# Altium PCB UPRISE3D-DW01(修改logo).PCBDOC (part 1 of 2)
Units mm, origin at the board's own origin, x right, y up, seen from the top; angles counter-clockwise.
Board outline 89.99 x 190.32 mm, 2 copper layers (Top Layer, Bottom Layer); 201 components, 175 nets, 672 pads, 420 vias.
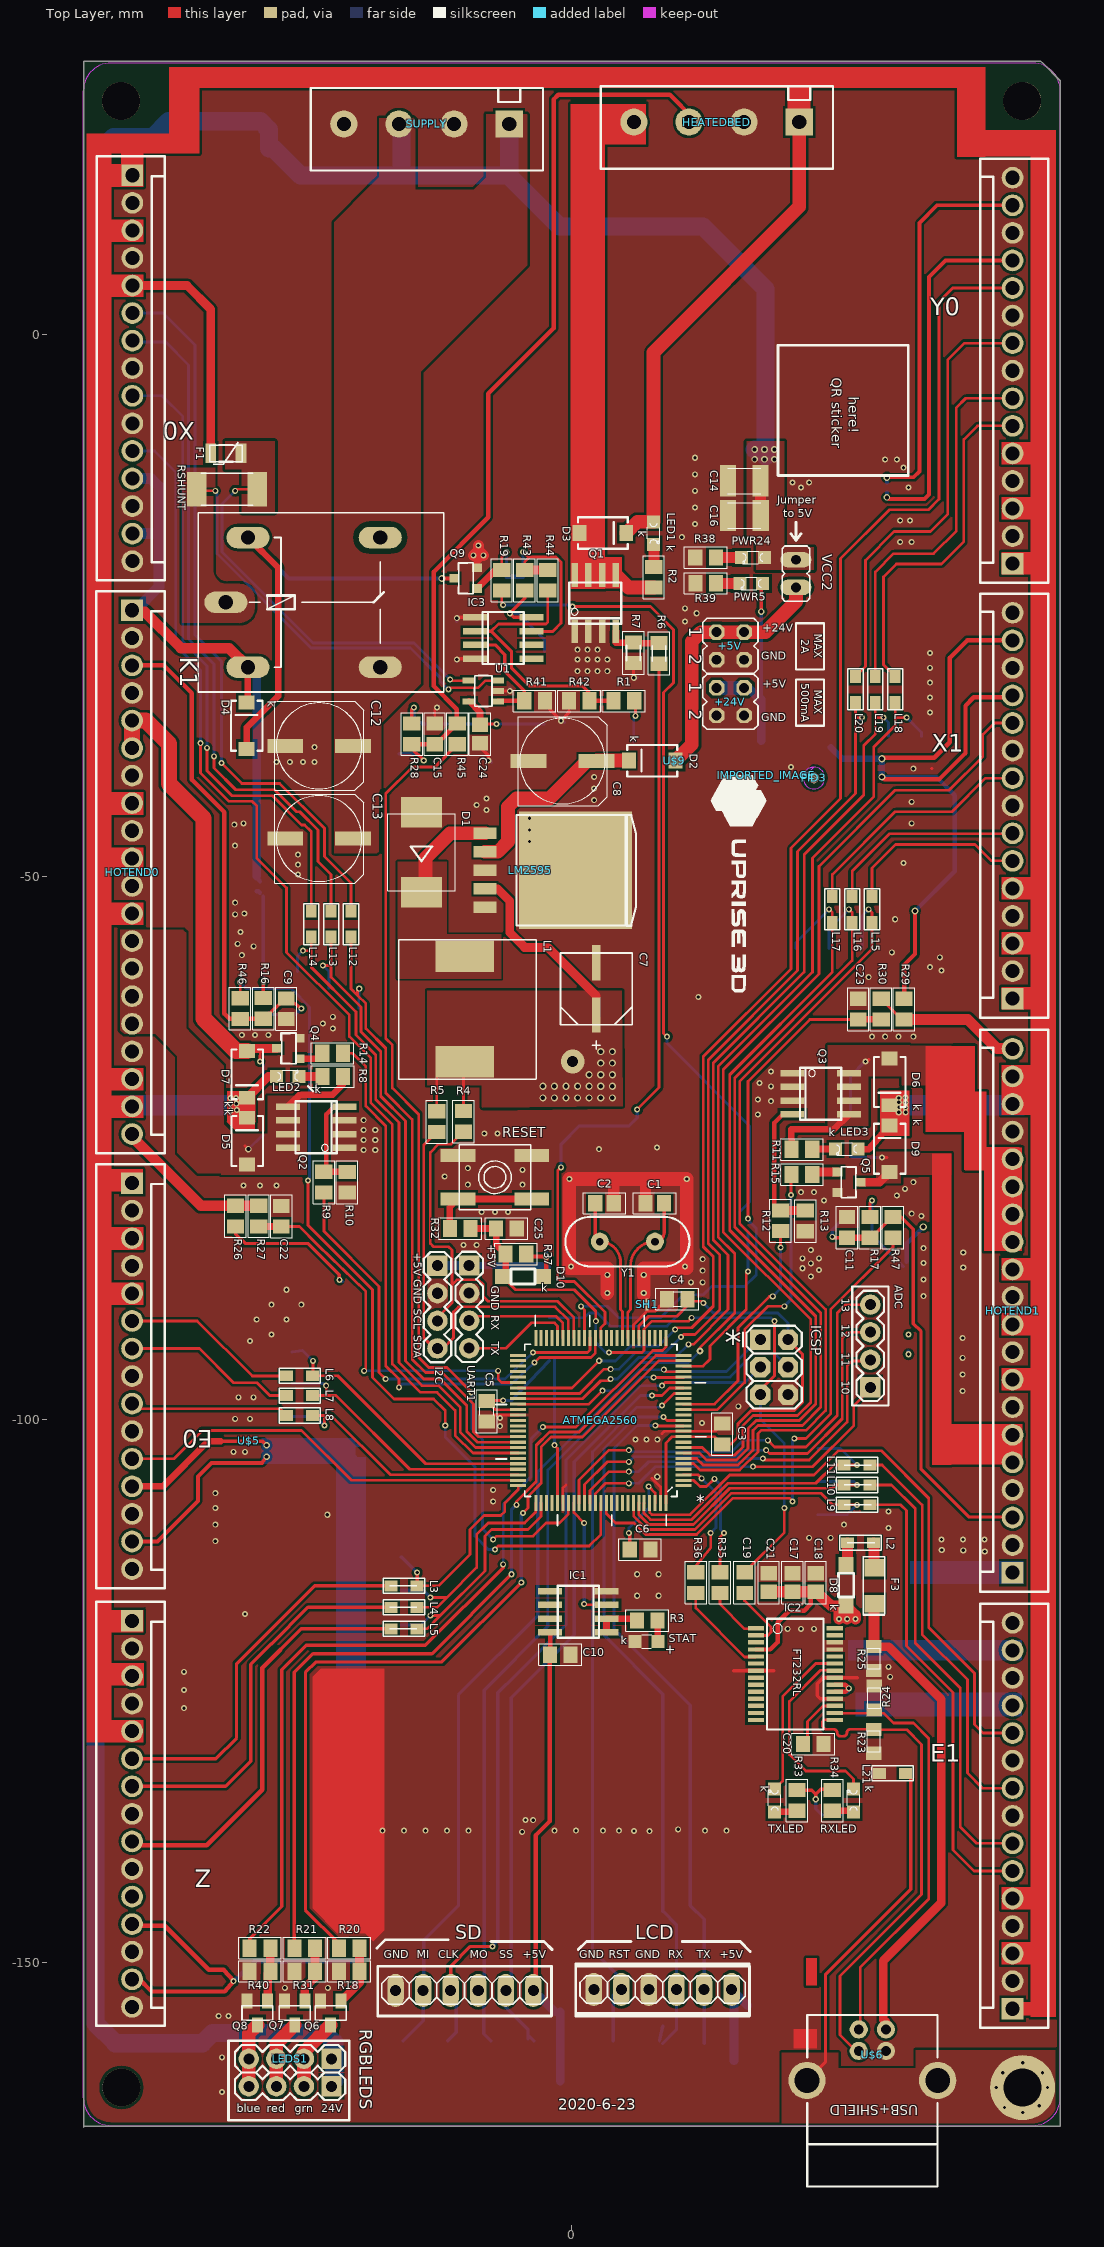
[diagram p0: Top Layer view]
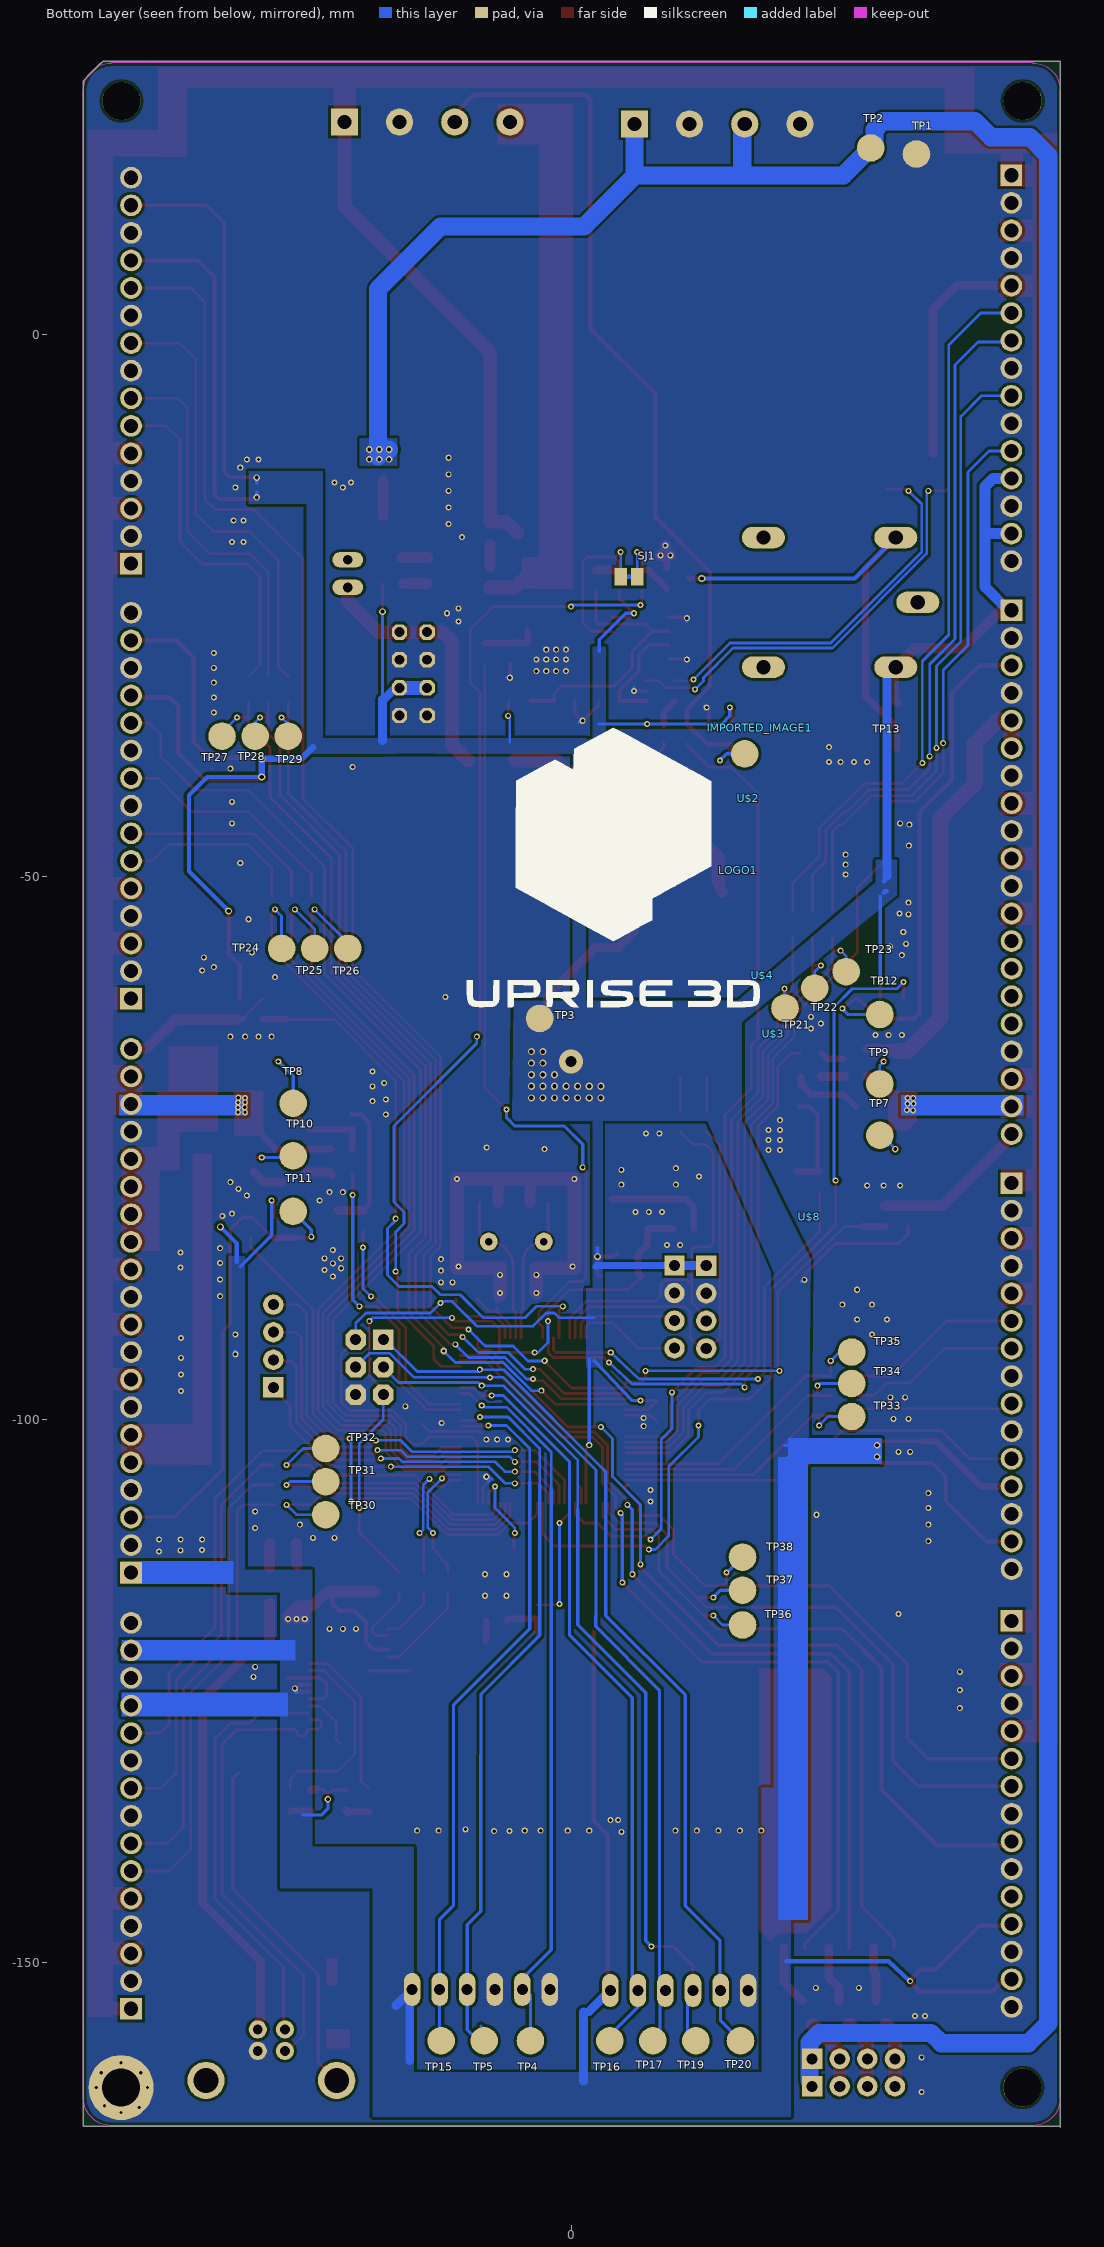
[diagram p1: Bottom Layer view, seen from below]

## Layer stack, top to bottom
Top Layer: signal copper 0.0356
Dielectric: dielectric 0.32, FR-4, Dk 4.8
Bottom Layer: signal copper 0.0356

## Board outline
-44.983,-165.176 -44.907,-165.1 45.009,-165.1 45.009,23.368 43.358,25.019 43.231,25.146 -44.983,25.146

## Design rules (kind name [scope] priority, off if disabled: settings)
Clearance [All] p1: gap=0.15
ComponentClearance [All] p1: gap=0.254 collisioncheckmode=3 verticalgap=0.254
HoleSize [All] p1: absolutevalues=TRUE maxlimit=100 minlimit=0.025 maxpercent=80.000 minpercent=20.000
PolygonConnect [All] p1: connectstyle=Direct reliefconductorwidth=0.254 reliefentries=4 polygonreliefangle="90 Angle"
RoutingVias [All] p1: holewidth=0.711 width=1.27 viastyle="Through Hole" minholewidth=0.3 minwidth=0.5 maxholewidth=0.711 maxwidth=1.27
SolderMaskExpansion [All] p1: expansion=0.102
TestPointUsage [All] p1: valid=0 allowmultiple=FALSE
Testpoint [(IsPad And (OnTopLayer Or OnBottomLayer))] p1: side=3 testpointundercomponent=TRUE minsize=1.016 maxsize=2.54 preferedsize=1.524 minholesize=0 maxholesize=1.016 preferedholesize=0.813 testpointgrid=0.025 style=297 order=0-112345678
Width [All] p1: maxlimit=5 minlimit=0.15 preferedwidth=0.254
17 further rules are at their usual default settings.

## Components (designator, comment, footprint, x,y, rotation, side; value= is the part's Value field where it differs from the comment)
+5V "" JP2Q 14.615,-28.713 r270 top
+24V "" JP2Q 14.615,-33.852 r270 top
ADC "" 1X04 27.508,-97.023 r90 top
ATMEGA2560 "" QFP50P1600X1600X120-100N 2.677,-100.075 r180 top
C1 "" C0805#1 7.659,-80.059 r180 top
C2 "" C0805#1 3.015,-80.059 r0 top
C3 "" C0805#2 13.864,-101.322 r90 top
C4 "" C0805#2 9.706,-88.898 r180 top
C5 "" C0805#2 -7.829,-99.226 r270 top
C6 "" C0805#2 6.286,-111.955 r0 top
C7 "" CAPAE660X610N 2.255,-60.313 r90 top
C8 "" UD-8X10_NICHICON -0.852,-39.322 r0 top
C9 "" C0805#2 -26.306,-62.132 r270 top
C10 "" C0805#2 -1.062,-121.649 r0 top
C11 "" C0805#2 25.367,-82.291 r90 top
C12 "" UD-8X10_NICHICON -23.282,-37.915 r0 top
C13 "" UD-8X10_NICHICON -23.282,-46.458 r0 top
C14 "" C1210K 15.893,-13.494 r180 top
C15 "" C0805#2 -12.633,-36.825 r90 top
C16 "" C1210K 15.899,-16.694 r180 top
C17 "" C0805#1 20.345,-115.006 r90 top
C18 "" C0805#1 22.479,-115.006 r90 top
C19 "" C0805#2 15.924,-115.006 r90 top
C20 "" C0805#2 22.251,-129.888 r0 top
C21 "" C0805#1 18.144,-115.006 r90 top
C22 "" C0805#2 -26.759,-81.257 r90 top
C23 "" C0805#2 26.387,-62.174 r90 top
C24 "" C0805#1 -8.458,-36.825 r270 top
C25 "" C0805#2 -6.02,-82.393 r0 top
D1 "" SMC -13.859,-47.724 r90 top
D2 "" SMA-DIODE 7.414,-39.279 r180 top
D3 "" SMA-DIODE 2.863,-18.312 r0 top
D4 "" SMA-DIODE -29.953,-36.068 r90 top
D5 "" SMA-DIODE -29.907,-74.336 r90 top
D6 "" SMA-DIODE 29.288,-68.888 r270 top
D7 "" SMA-DIODE -29.907,-68.183 r270 top
D8 "" SOD123 25.274,-115.251 r90 top
D9 "" SMA-DIODE 29.288,-75.04 r90 top
D10 "" SOD123 -4.496,-86.812 r180 top
E0 "" 2.54MM-15P -40.513,-95.987 r180 top
E1 "" 2.54mm-15P 40.615,-136.5 r0 top
F1 "" PTC-1206 -31.872,-10.974 r180 top
F3 "" MICROBUILDER_1206_PTC 27.855,-115.293 r90 top
FID3 "" FIDUCIAL_1MM 22.302,-40.868 r0 top
HEATEDBED "" 5.08-301-4P 20.955,19.558 r180 top
HOTEND0 "" 2.54MM-20P -40.513,-49.555 r180 top
HOTEND1 "" 2.54mm-20P 40.615,-89.967 r0 top
I2C "" 1X04 -12.379,-85.814 r270 top
IC1 "" SO08 0.597,-117.698 r90 top
IC2 "FT232RL" SSOP28 20.593,-123.45 r270 top
IC3 "" SO08 -6.325,-27.986 r270 top
ICSP "" 2X3-NS 18.647,-95.162 r270 top
IMPORTED_IMAGE "Comment" IMPORTED_IMAGE 17.932,-40.64 r270 top
IMPORTED_IMAGE1 "Comment" IMPORTED_IMAGE -17.307,-36.233 r0 bottom (schematic designator IMPORTED_IMAGE)
K1 "" G5LE -22.347,-24.695 r0 top
L1 "" SSR1260 -9.853,-62.155 r270 top
L2 "" 0805 26.594,-111.349 r180 top
L3 "" 0805 -15.469,-115.311 r0 top
L4 "" 0805 -15.469,-117.292 r0 top
L5 "" 0805 -15.469,-119.274 r0 top
L6 "" 0805 -25.07,-95.956 r180 top
L7 "" 0805 -25.07,-97.785 r180 top
L8 "" 0805 -25.07,-99.614 r180 top
L9 "" 0805 26.289,-107.844 r180 top
L10 "" 0805 26.289,-106.015 r180 top
L11 "" 0805 26.289,-104.186 r180 top
L12 "" 0805 -20.345,-54.351 r270 top
L13 "" 0805 -22.174,-54.351 r270 top
L14 "" 0805 -24.003,-54.351 r270 top
L15 "" 0805 27.661,-52.98 r270 top
L16 "" 0805 25.832,-52.98 r270 top
L17 "" 0805 24.003,-52.98 r270 top
L18 "" 0805 29.794,-32.71 r270 top
L19 "" 0805 27.965,-32.71 r270 top
L20 "" 0805 26.137,-32.71 r270 top
L21 "" 0805 29.54,-132.588 r0 top
LCD "" 1X06 8.375,-152.5 r180 top
LED1 "" CHIPLED_0805 7.531,-18.323 r180 top
LED2 "" CHIPLED_0805 -26.172,-68.384 r270 top
LED3 "" CHIPLED_0805 25.335,-75.059 r90 top
LEDS1 "" 1X04 -22.141,-158.894 r180 top
LM2595 "" TO263-5 -2.207,-49.382 r270 top
LOGO1 "" OSHW-LOGO-M -15.35,-49.36 r90 bottom
PWR5 "" CHIPLED_0805 16.537,-22.964 r90 top
PWR24 "" CHIPLED_0805 16.689,-20.561 r90 top
Q1 "" SOIC8 2.166,-24.762 r0 top
Q2 "" SOIC8 -23.548,-73.062 r90 top
Q3 "" SOIC8 22.928,-69.971 r270 top
Q4 "" SOT23-3 -26.065,-65.795 r90 top
Q5 "" SOT23-3 25.49,-78.128 r270 top
Q6 "" SOT23 -22.218,-154.676 r180 top
Q7 "" SOT23 -25.523,-154.668 r180 top
Q8 "" SOT23 -28.97,-154.671 r180 top
Q9 "" SOT23-3 -9.741,-22.47 r90 top
R1 "" M0805 4.801,-33.777 r180 top
R2 "" M0805 7.556,-22.372 r90 top
R3 "" R0805 6.955,-118.502 r180 top
R4 "" M0805 -9.98,-72.525 r270 top
R5 "" M0805 -12.436,-72.538 r270 top
R6 "" M0805 8.034,-29.401 r270 top
R7 "" M0805 5.682,-29.351 r270 top
R8 "" M0805 -22.02,-68.384 r180 top
R9 "" M0805 -22.838,-78.112 r270 top
R10 "" M0805 -20.697,-78.126 r270 top
R11 "" M0805 21.209,-75.096 r0 top
R12 "" M0805 19.242,-81.683 r270 top
R13 "" M0805 21.525,-81.692 r270 top
R14 "" M0805 -22.04,-66.245 r0 top
R15 "" M0805 21.209,-77.414 r180 top
R16 "" M0805 -28.421,-62.114 r90 top
R17 "" M0805 27.478,-82.291 r90 top
R18 "" M0805 -20.498,-150.827 r180 top
R19 "" M0805 -6.451,-22.652 r270 top
R20 "" M0805 -20.498,-148.693 r180 top
R21 "" M0805 -24.613,-148.693 r180 top
R22 "" M0805 -28.727,-148.693 r180 top
R23 "" CT/CN0805 27.813,-129.637 r270 top
R24 "" CT/CN0805 27.864,-125.646 r90 top
R25 "" CT/CN0805 27.813,-122.017 r270 top
R26 "" M0805 -30.991,-81.242 r270 top
R27 "" M0805 -28.847,-81.242 r270 top
R28 "" M0805 -14.734,-36.825 r90 top
R29 "" M0805 30.614,-62.174 r90 top
R30 "" M0805 28.499,-62.174 r270 top
R31 "" M0805 -24.613,-150.827 r180 top
R32 "" M0805 -10.287,-82.393 r180 top
R33 "" M0805 20.755,-135.084 r90 top
R34 "" M0805 24.01,-135.084 r90 top
R35 "" M0805 13.649,-115.006 r270 top
R36 "" M0805 11.43,-115.006 r270 top
R37 "" M0805 -5.145,-84.732 r0 top
R38 "" R0805 12.329,-20.571 r0 top
R39 "" R0805 12.344,-22.939 r0 top
R40 "" M0805 -28.727,-150.827 r180 top
R41 "" M0805 -3.429,-33.777 r180 top
R42 "" M0805 0.686,-33.777 r180 top
R43 "" M0805 -4.343,-22.652 r90 top
R44 "" M0805 -2.21,-22.652 r90 top
R45 "" M0805 -10.541,-36.825 r270 top
R46 "" M0805 -30.556,-62.124 r90 top
R47 "" M0805 29.591,-82.291 r270 top
RESET "" EVQ-Q2 -7.087,-77.668 r180 top
RGBLEDS "" 1X04 -22.141,-161.421 r180 top
RSHUNT "" R2512 -31.775,-14.27 r0 top
RXLED "" CHIPLED_0805 25.951,-135.086 r0 top
SD "" 1X06 -9.889,-152.585 r0 top
SH1 "" SHORT_TOP-50 6.934,-89.251 r270 top
SJ1 "" SJ -5.258,-22.347 r180 bottom
STAT "" CHIP-LED0805 6.879,-120.432 r90 top
SUPPLY "" 5.08-301-4P -5.766,19.38 r180 top
TP1 "" B2,54 -31.75,16.612 r180 bottom
TP2 "" B2,54 -27.534,17.17 r180 bottom
TP3 "" B2,54 2.972,-63.038 r270 bottom
TP4 "" B2,54 3.819,-157.228 r90 bottom
TP5 "" B2,54 8.087,-157.228 r90 bottom
TP7 "" B2,54 -28.372,-73.799 r270 bottom
TP8 "" B2,54 25.679,-70.848 r270 bottom
TP9 "" B2,54 -28.372,-69.074 r270 bottom
TP10 "" B2,54 25.679,-75.687 r270 bottom
TP11 "" B2,54 25.679,-80.812 r270 bottom
TP12 "" B2,54 -28.372,-62.673 r270 bottom
TP13 "" B2,54 -15.926,-38.654 r180 bottom
TP15 "" B2,54 12.049,-157.228 r90 bottom
TP16 "" B2,54 -3.496,-157.228 r90 bottom
TP17 "" B2,54 -7.458,-157.228 r90 bottom
TP19 "" B2,54 -11.421,-157.228 r90 bottom
TP20 "" B2,54 -15.535,-157.228 r90 bottom
TP21 "" B2,54 -19.634,-62.073 r180 bottom
TP22 "" B2,54 -22.377,-60.244 r180 bottom
TP23 "" B2,54 -25.273,-58.72 r180 bottom
TP24 "" B2,54 26.746,-56.586 r0 bottom
TP25 "" B2,54 23.698,-56.586 r0 bottom
TP26 "" B2,54 20.65,-56.586 r0 bottom
TP27 "" B2,54 32.233,-37.028 r0 bottom
TP28 "" B2,54 29.185,-37.028 r0 bottom
TP29 "" B2,54 26.137,-37.028 r0 bottom
TP30 "" B2,54 22.682,-108.758 r270 bottom
TP31 "" B2,54 22.682,-105.71 r270 bottom
TP32 "" B2,54 22.682,-102.662 r270 bottom
TP33 "" B2,54 -25.781,-99.716 r270 bottom
TP34 "" B2,54 -25.781,-96.668 r270 bottom
TP35 "" B2,54 -25.781,-93.772 r270 bottom
TP36 "" B2,54 -15.723,-118.918 r270 bottom
TP37 "" B2,54 -15.723,-115.718 r270 bottom
TP38 "" B2,54 -15.723,-112.67 r270 bottom
TXLED "" CHIPLED_0805 18.691,-135.086 r0 top
U1 "" SOT23-5 -8.153,-32.863 r90 top
U$2 "" TONNE_10.00 -16.231,-42.769 r90 bottom
U$3 "" FCC_10X4.175MM -18.542,-64.435 r90 bottom
U$4 "" CE-4MM -17.551,-59.076 r90 bottom
U$5 "" BCN3D_LOGO -29.747,-101.923 r270 top
U$6 "USB+SHIELD" USB-B-PTH 27.691,-158.166 r90 top
U$8 "" BCN3D_LOGO -21.869,-81.326 r90 bottom
U$9 "" FCIM_LOGO 9.433,-39.289 r270 top
UART1 "" 1X04 -9.45,-85.8 r270 top
VCC2 "" JP1 20.65,-22.042 r180 top
X0 "" 2.54MM-15P -40.488,-3.124 r180 top
X1 "" 2.54mm-15P 40.615,-43.434 r0 top
Y0 "" 2.54mm-15P 40.615,-3.353 r0 top
Y1 "" HC49US 5.122,-83.599 r0 top
Z "" 2.54MM-15P -40.513,-136.322 r180 top

## Footprints (in the part's own frame and the unit in brackets; to place one, negate y for a bottom-side part, rotate by r counter-clockwise, add the part's x,y. Pads: shape width x height; smd on the part's side, far side on the other; paste and mask are expansions set on the pad)
1X04 [mil] "1X04"
  rect 74x74 / inner rect 60x60 / far side rect 74x74 hole 40: 1(0,0)
  round 74 / inner round 60 / far side round 74 hole 40: 2(100,0) 3(200,0) 4(300,0)
  silkscreen extent -50,-50 350,50
1X06 [mil] "1X06"
  oval 60x120 / inner round 60 / far side oval 60x120 hole 40: 1(-250,0) 2(-150,0) 3(-50,0) 4(50,0) 5(150,0) 6(250,0)
  silkscreen extent -314,-93 316,87
2.54MM-15P [mm]
  rect 2x2 hole 1.3: 1(0,-17.78)
  round 2 hole 1.3: 2(0,-15.24) 3(0,-12.7) 4(0,-10.16) 5(0,-7.62) 6(0,-5.08) 7(0,-2.54) 8(0,0) 9(0,2.54) 10(0,5.08) 11(0,7.62) 12(0,10.16) 13(0,12.7) 14(0,15.24) 15(0,17.78)
  silkscreen extent -3,-19.53 3.3,19.53
2.54mm-15P [mm]
  rect 2x2 hole 1.3: 1(0,-17.78)
  round 2 hole 1.3: 2(0,-15.24) 3(0,-12.7) 4(0,-10.16) 5(0,-7.62) 6(0,-5.08) 7(0,-2.54) 8(0,0) 9(0,2.54) 10(0,5.08) 11(0,7.62) 12(0,10.16) 13(0,12.7) 14(0,15.24) 15(0,17.78)
  silkscreen extent -3,-19.53 3.3,19.53
2.54MM-20P [mm]
  rect 2x2 hole 1.3: 1(0,-24.13)
  round 2 hole 1.3: 2(0,-21.59) 3(0,-19.05) 4(0,-16.51) 5(0,-13.97) 6(0,-11.43) 7(0,-8.89) 8(0,-6.35) 9(0,-3.81) 10(0,-1.27) 11(0,1.27) 12(0,3.81) 13(0,6.35) 14(0,8.89) 15(0,11.43) 16(0,13.97) 17(0,16.51) 18(0,19.05) 19(0,21.59) 20(0,24.13)
  silkscreen extent -3,-25.88 3.3,25.88
2.54mm-20P [mm]
  rect 2x2 hole 1.3: 1(0,-24.13)
  round 2 hole 1.3: 2(0,-21.59) 3(0,-19.05) 4(0,-16.51) 5(0,-13.97) 6(0,-11.43) 7(0,-8.89) 8(0,-6.35) 9(0,-3.81) 10(0,-1.27) 11(0,1.27) 12(0,3.81) 13(0,6.35) 14(0,8.89) 15(0,11.43) 16(0,13.97) 17(0,16.51) 18(0,19.05) 19(0,21.59) 20(0,24.13)
  silkscreen extent -3,-25.88 3.3,25.88
2X3-NS [mil] "2X3-NS"
  rect 74x74 / inner rect 60x60 / far side rect 74x74 hole 40: 1(-100,-50)
  oct 74x74 / inner oct 60x60 / far side oct 74x74 hole 40: 2(-100,50) 3(0,-50) 4(0,50) 5(100,-50) 6(100,50)
  silkscreen extent -150,-113 150,100
5.08-301-4P [mm]
  rect 2.5x2.5 hole 1.3: 1(0,0)
  round 2.5 hole 1.3: 2(5.08,0) 3(10.16,0) 4(15.24,0)
  silkscreen extent -3.1,-3.3 18.29,4.3
0805 [mm] "0805"
  rect 1.2x1 smd: 1(-1.2,0) 2(1.2,0)
  silkscreen extent -1.9,-0.7 1.9,0.7
B2,54 [mm] "B2,54"
  rrect100% 2.54x2.54 smd paste+0: TP(0,0)
BCN3D_LOGO [mm] "BCN3D_LOGO"
C0805#1 [mm] "C0805"
  rect 1.3x1.5 smd: 1(-0.85,0) 2(0.85,0)
  silkscreen extent -1.97,-0.98 1.97,0.98
C0805#2 [mm] "C0805"
  rect 1.3x1.5 smd: 1(-0.95,0) 2(0.95,0)
  silkscreen extent -1.97,-0.98 1.97,0.98
C1210K [mm] "C1210K"
  rect 1.5x2.9 smd: 1(-1.5,0) 2(1.5,0)
  silkscreen extent -1.53,-1.18 1.53,1.18
CAPAE660X610N [mil] "CAPAE660X610N"
  rect 128x30 smd: 1(-95,0) 2(95,0)
  silkscreen extent -219,-130 130,130
CE-4MM [mm] "CE-4MM"
CHIP-LED0805 [mm] "CHIP-LED0805"
  rect 1.2x1.2 smd: A(0,-1.05) C(0,1.05)
  silkscreen extent -0.63,-0.47 0.63,0.45
CHIPLED_0805 [mm] "CHIPLED_0805"
  rect 1.2x1.2 smd: A(0,-1.05) C(0,1.05)
  silkscreen extent -0.58,-0.93 0.58,0.95
CT/CN0805 [mm] "CT/CN0805"
  rect 1.2x1.4 smd: 1(-1.1,0) 2(1.1,0)
  silkscreen extent -0.95,-0.6 0.95,0.6
EVQ-Q2 [mm] "EVQ-Q2"
  rect 3.2x1.2 smd: A(-3.4,-2) A'(3.4,-2) B(-3.4,2) B'(3.4,2)
  silkscreen extent -3.3,-3 3.3,3
FCC_10X4.175MM [mm] "FCC_10X4.175MM"
FCIM_LOGO [mm] "FCIM_LOGO"
FIDUCIAL_1MM [mm] "FIDUCIAL_1MM"
  rrect100% 1x1 smd paste+0 mask+0: 1(0,0)
  Top Layer keep-out region: -1,0 -0.924,-0.383 -0.707,-0.707 -0.383,-0.924 0,-1 0,-1 0.383,-0.924 0.707,-0.707 0.924,-0.383 1,0 1,0 0.866,0.5 0.5,0.866 0,1 0,1 -0.5,0.866 -0.866,0.5 -1,0 -1,0 -0.866,0.5 -0.5,0.866 0,1
G5LE [mil] "G5LE"
  oval 156x78 / inner round 60 / far side oval 156x78 hole 52: 1(-295,-235) 2(-295,235) O(185,235) P(-375,0) S(185,-235)
  silkscreen extent -475,-325 415,325
HC49US [mil] "HC49US"
  round 65 / inner round 60 / far side round 65 hole 27.56: 1(-100,0) 2(100,0)
  silkscreen extent -225,-90 225,90
IMPORTED_IMAGE [mm]
  silkscreen extent 0,-5.13 19.98,0
JP1 [mil] "JP1"
  oval 112x56 / inner round 60 / far side oval 112x56 hole 36: 1(0,-50) 2(0,50)
  silkscreen extent -50,-100 50,100
JP2Q [mil] "JP2Q"
  oct 56x56 / inner oct 60x60 / far side oct 56x56 hole 36: 1(-50,-50) 2(50,-50) 3(-50,50) 4(50,50)
  silkscreen extent -100,-100 100,100
M0805 [mm] "M0805"
  rect 1.3x1.6 smd: 1(-0.95,0) 2(0.95,0)
  silkscreen extent -1.97,-0.98 1.97,0.98
MICROBUILDER_1206_PTC [mm] "MICROBUILDER_1206_PTC"
  rect 1.6x1.8 smd: 1(-1.654,0) 2(1.654,0)
  silkscreen extent -2.73,-1 2.73,1
OSHW-LOGO-M [mm] "OSHW-LOGO-M"
PTC-1206 [mm] "PTC-1206"
  rect 1x1.8 smd: 1(-1.4,0) 2(1.4,0)
  silkscreen extent -1.5,-1.02 1.5,1.02
QFP50P1600X1600X120-100N [mil] "QFP50P1600X1600X120-100N"
  rect 58x11 smd: 1(-300,236) 2(-300,217) 3(-300,197) 4(-300,177) 5(-300,157) 6(-300,138) 7(-300,118) 8(-300,98) 9(-300,79) 10(-300,59) 11(-300,39) 12(-300,20) 13(-300,0) 14(-300,-20) 15(-300,-39) 16(-300,-59) 17(-300,-79) 18(-300,-98) 19(-300,-118) 20(-300,-138) 21(-300,-157) 22(-300,-177) 23(-300,-197) 24(-300,-217) 25(-300,-236) 51(300,-236) 52(300,-217) 53(300,-197) 54(300,-177) 55(300,-157) 56(300,-138) 57(300,-118) 58(300,-98) 59(300,-79) 60(300,-59) 61(300,-39) 62(300,-20) 63(300,0) 64(300,20) 65(300,39) 66(300,59) 67(300,79) 68(300,98) 69(300,118) 70(300,138) 71(300,157) 72(300,177) 73(300,197) 74(300,217) 75(300,236)
  rect 11x58 smd: 26(-236,-300) 27(-217,-300) 28(-197,-300) 29(-177,-300) 30(-157,-300) 31(-138,-300) 32(-118,-300) 33(-98,-300) 34(-79,-300) 35(-59,-300) 36(-39,-300) 37(-20,-300) 38(0,-300) 39(20,-300) 40(39,-300) 41(59,-300) 42(79,-300) 43(98,-300) 44(118,-300) 45(138,-300) 46(157,-300) 47(177,-300) 48(197,-300) 49(217,-300) 50(236,-300) 76(236,300) 77(217,300) 78(197,300) 79(177,300) 80(157,300) 81(138,300) 82(118,300) 83(98,300) 84(79,300) 85(59,300) 86(39,300) 87(20,300) 88(0,300) 89(-20,300) 90(-39,300) 91(-59,300) 92(-79,300) 93(-98,300) 94(-118,300) 95(-138,300) 96(-157,300) 97(-177,300) 98(-197,300) 99(-217,300) 100(-236,300)
  silkscreen extent -382,-382 381,382
R0805 [mm] "R0805"
  rect 1.3x1.5 smd: 1(-0.95,0) 2(0.95,0)
  silkscreen extent -1.97,-0.98 1.97,0.98
R2512 [mm] "R2512"
  rect 1.8x3.2 smd: 1(-2.8,0) 2(2.8,0)
  silkscreen extent -2.36,-1.47 2.39,1.47
SHORT_TOP-50 [mil] "SHORT_TOP-50"
  rect 24x12 smd paste+0 mask+0: 1(15,0) 2(-5,0)
SJ [mil] "SJ"
  rect 46x63 smd: 1(-30,0) 2(30,0)
SMA-DIODE [mm] "SMA-DIODE"
  rect 1.27x1.47 smd: A(-2.15,0) C(2.15,0)
  silkscreen extent -2.3,-1.45 2.3,1.45
SMC [mm] "SMC"
  rect 2.8x3.8 smd: A(3.7,0) C(-3.7,0)
  silkscreen extent -3.56,-3.1 3.56,3.1
SO08 [mm] "SO08"
  rect 0.6x2.2 smd: 1(-1.905,-2.6) 2(-0.635,-2.6) 3(0.635,-2.6) 4(1.905,-2.6) 5(1.905,2.6) 6(0.635,2.6) 7(-0.635,2.6) 8(-1.905,2.6)
  silkscreen extent -2.4,-1.9 2.4,1.9
SOD123 [mm] "SOD123"
  rect 1.4x1.4 smd: A(1.9,0) C(-1.9,0)
  silkscreen extent -1.1,-0.7 1.1,0.7
SOIC8 [mm] "SOIC8"
  rect 0.6x2.2 smd: 1(-1.905,-2.6) 2(-0.635,-2.6) 3(0.635,-2.6) 4(1.905,-2.6) 5(1.905,2.6) 6(0.635,2.6) 7(-0.635,2.6) 8(-1.905,2.6)
  silkscreen extent -2.4,-1.9 2.4,1.9
SOT23 [mm] "SOT23"
  rect 1x1.4 smd: 1(-0.95,-1.1) 2(0.95,-1.1) 3(0,1.1)
  silkscreen extent -1.42,-0.66 1.42,0.66
SOT23-3 [mil] "SOT23-3"
  rect 31.5x35.43 smd: 1(-37.4,-39.37) 2(37.4,-39.37) 3(0,43.31)
  silkscreen extent -56,-26 56,28
SOT23-5 [mm] "SOT23-5"
  rect 0.55x1.2 smd: 1(-0.95,-1.3) 2(0,-1.3) 3(0.95,-1.3) 4(0.95,1.3) 5(-0.95,1.3)
  silkscreen extent -1.42,-0.8 1.42,0.81
SSOP28 [mm] "SSOP28"
  rect 0.4x1.5 smd: 1(-4.225,-3.625) 2(-3.575,-3.625) 3(-2.925,-3.625) 4(-2.275,-3.625) 5(-1.625,-3.625) 6(-0.975,-3.625) 7(-0.325,-3.625) 8(0.325,-3.625) 9(0.975,-3.625) 10(1.625,-3.625) 11(2.275,-3.625) 12(2.925,-3.625) 13(3.575,-3.625) 14(4.225,-3.625) 15(4.225,3.625) 16(3.575,3.625) 17(2.925,3.625) 18(2.275,3.625) 19(1.625,3.625) 20(0.975,3.625) 21(0.325,3.625) 22(-0.325,3.625) 23(-0.975,3.625) 24(-1.625,3.625) 25(-2.275,3.625) 26(-2.925,3.625) 27(-3.575,3.625) 28(-4.225,3.625)
  silkscreen extent -5.1,-2.6 5.1,2.6
SSR1260 [mm] "SSR1260"
  rect 2.9x5.4 smd: A(-4.85,0) B(4.85,0)
  silkscreen extent -6.38,-6.11 6.46,6.56
TO263-5 [mil] "TO263-5"
  rect 42x85 smd: 1(-134,-228) 2(-67,-228) 3(0,-228) 4(67,-228) 5(134,-228)
  rect 425.2x409.84 smd: 6(0,100)
  silkscreen extent -201,-113 201,320
TONNE_10.00 [mm] "TONNE_10.00"
UD-8X10_NICHICON [mm] "UD-8X10_NICHICON"
  rect 3.3x1.3 smd: +(3.125,0) -(-3.125,0)
  silkscreen extent -4.1,-4.1 4.1,4.1
USB-B-PTH [mil] "USB-B-PTH"
  round 66 / inner round 60 / far side round 66 hole 36: D+(0,49.21) D-(78,49.21) GND(0,-49.21) VBUS(78,-49.21)
  round 135 / inner round 60 / far side round 135 hole 90: S1(-107,-237) S2(-107,237)
  silkscreen extent -492,-236 130,236

## Part data
+5V +24V: library part JP2Q
ADC I2C LEDS1 RGBLEDS UART1: library part 1X04
ATMEGA2560: library part QFP50P1600X1600X120-100N
C1 C2 C3 C4 C5 C6 C9 C10 C11 C15 C17 C18 C19 C20 C21 C22 C23 C24 C25: library part C0805
C7: library part CAPAE660X610N
C8 C12 C13: library part UD-8X10_NICHICON
C14 C16: library part C1210K
D1: library part SMC
D2 D3 D4 D5 D6 D7 D9: library part SMA-DIODE
D8 D10: library part SOD123
E0 E1 X0 X1 Y0 Z: library part TE_FFC_CON1MM
F1: library part PTC-1206
F3: library part MICROBUILDER_1206_PTC
FID3: library part FIDUCIAL_1MM
HEATEDBED SUPPLY: library part MOLEX_MINIFIT-JR
HOTEND0 HOTEND1: library part 68612014422
IC1 IC3: library part SO08
IC2: library part SSOP28
ICSP: library part 2X3-NS
K1: library part G5LE
L1: library part SSR1260
L2 L3 L4 L5 L6 L7 L8 L9 L10 L11 L12 L13 L14 L15 L16 L17 L18 L19 L20 L21: library part 0805
LCD SD: library part 1X06
LED1 LED2 LED3 PWR5 PWR24 RXLED TXLED: library part CHIPLED_0805
LM2595: library part TO263-5
LOGO1: library part OSHW-LOGO-M
Q1 Q2 Q3: library part SOIC8
Q4 Q5 Q9: library part SOT23-3
Q6 Q7 Q8: library part SOT23
R1 R2 R4 R5 R6 R7 R8 R9 R10 R11 R12 R13 R14 R15 R16 R17 R18 R19 R20 R21 R22 R26 R27 R28 R29 R30 R31 R32 R33 R34 R35 R36 R37 R40 R41 R42 R43 R44 R45 R46 R47: library part M0805
R3 R38 R39: library part R0805
R23 R24 R25: library part CT/CN0805
RESET: library part EVQ-Q2
RSHUNT: library part R2512
SH1: library part SHORT_TOP-50
SJ1: library part SJ
STAT: library part CHIP-LED0805
TP1 TP2 TP3 TP4 TP5 TP7 TP8 TP9 TP10 TP11 TP12 TP13 TP15 TP16 TP17 TP19 TP20 TP21 TP22 TP23 TP24 TP25 TP26 TP27 TP28 TP29 TP30 TP31 TP32 TP33 TP34 TP35 TP36 TP37 TP38: library part B2,54
U1: library part SOT23-5
U$2: library part TONNE_10.00
U$3: library part FCC_10X4.175MM
U$4: library part CE-4MM
U$5 U$8: library part BCN3D_LOGO
U$6: library part USB-B-PTH
U$9: library part FCIM_LOGO
VCC2: library part JP1
Y1: library part HC49US

## Free pads (board coordinates)
  round 3.5 hole 3.5 unplated: MH1(-41.54,21.5) MH1(-41.5,-161.54) MH1(41.5,21.493)
  round 6 hole 3.5 unplated: MH1(41.54,-161.546)

## Via types
v1: diameter 0.555, hole 0.3, Top Layer to Bottom Layer, tented both sides, 375 vias
v2: diameter 0.656, hole 0.406, Top Layer to Bottom Layer, tented both sides, 26 vias
v3: diameter 0.606, hole 0.356, Top Layer to Bottom Layer, tented both sides, 14 vias
v4: diameter 0.6, hole 0.3, Top Layer to Bottom Layer, tented both sides, 1 vias
v5: diameter 0.61, hole 0.3, Top Layer to Bottom Layer, tented both sides, 1 vias
v6: diameter 0.61, hole 0.305, Top Layer to Bottom Layer, tented both sides, 1 vias
v7: diameter 2.184, hole 1.016, Top Layer to Bottom Layer, 1 vias
v8: diameter 0.555, hole 0.3, Top Layer to Bottom Layer, 1 vias

## Nets (pads, with @x,y where several pads share a name; then routed paths per layer and width w, separated by ;. In a path a pad name is that pad's centre, name@x,y a point inside that pad or via, vN(x,y) a via of type N, cw(c..) or ccw(c..) an arc to the next point about the centre after c; other vN are vias at no path point)
24VBF: F1.1 RSHUNT.2 U1.4 | length 35.9
  Top Layer w0.254: v1(-31.013,-14.422) -30.861,-14.27 RSHUNT.2@-28.975,-14.27 ; v1(-11.201,-31.796) -11.085,-31.913 U1.4@-9.454,-31.913
  Bottom Layer w0.254: v1(-31.013,-14.422) -32.233,-15.642 -32.233,-20.061 -23.851,-28.443 -14.554,-28.443 v1(-11.201,-31.796)
24VINA: K1.P RSHUNT.1 U1.3 | length 39.3
  Top Layer w0.254: RSHUNT.1@-34.575,-14.27 ccw(c-34.423,-14.27) -34.423,-14.422 v1(-32.842,-14.422) ; v1(-11.354,-32.71) -11.201,-32.558 -8.611,-32.558 -7.965,-31.913 U1.3@-6.853,-31.913
  Bottom Layer w0.254: v1(-32.842,-14.422) -32.69,-14.422 -32.69,-20.214 -24.003,-28.9 -14.859,-28.9 -12.116,-31.644 -12.116,-31.948 v1(-11.354,-32.71)
111: D3.A HEATEDBED.4 Q1.5 Q1.6 Q1.7 Q1.8 R2.1 | length 4
  Top Layer w1.27: Q1.5@4.071,-22.162 5.231,-23.322 R2.1@7.556,-23.322
!RESET: ATMEGA2560.30 C19.2 C25.1 D10.A ICSP.5 R32.1 R37.1 | length 65.6
  Top Layer w0.254: D10.A@-6.396,-86.812 -5.177,-88.032 0.229,-88.032 2.21,-90.013 v1(2.21,-90.927) ; v1(3.429,-93.823) 6.477,-93.823 6.665,-93.635 ATMEGA2560.30@6.665,-92.455 6.665,-91.654 7.391,-90.927 10.744,-90.927 v1(11.049,-90.622) ; C19.2@15.924,-114.056 19.583,-110.397 v1(19.583,-108.148) ; ICSP.5@17.377,-97.702 17.377,-97.248 18.669,-95.956 v1(18.669,-90.927)
  Top Layer w0.61: R32.1@-9.337,-82.393 C25.1@-6.97,-82.393 -6.97,-83.857 R37.1@-6.095,-84.732 -6.095,-86.511 D10.A@-6.396,-86.812
  Bottom Layer w0.254: v1(2.21,-90.927) 2.21,-92.908 3.124,-93.823 v1(3.429,-93.823) ; v1(11.049,-90.622) 18.364,-90.622 v1(18.669,-90.927) ; ICSP.5@17.377,-97.702 17.377,-99.999 19.583,-102.205 v1(19.583,-108.148)
+5V: +24V.1 +24V.3 ATMEGA2560.10 ATMEGA2560.31 ATMEGA2560.61 ATMEGA2560.80 ATMEGA2560.100 C3.1 C4.1 C5.1 C7.1 C10.1 C17.1 C18.1 C21.1 C24.1 D4.C D8.C D10.C E0.12 E0.14 E1.12 E1.14 HOTEND0.1 HOTEND1.1 I2C.1 IC1.8 IC2.4 IC2.19 IC2.20 IC3.8 ICSP.2 K1.1 L1.B LCD.1 LM2595.4 PWR5.A R1.1 R4.1 R5.1 R16.2 R17.2 R26.2 R28.2 R29.2 R33.2 R34.2 R37.2 R43.1 SD.6 TP3.TP U1.5 UART1.1 X0.12 X0.14 X1.12 X1.14 Y0.12 Y0.14 Z.12 Z.14 | length 573.2
  Top Layer w0.254: R5.1@-12.436,-71.588 -12.436,-68.54 -12.421,-68.524 ; L1.B@-9.982,-68.372 -9.98,-68.374 R4.1@-9.98,-71.575 ; v1(-6.325,-98.242) -7.794,-98.242 C5.1@-7.829,-98.276 -7.02,-99.085 ATMEGA2560.61@-4.943,-99.085 ; v1(-1.6,-102.357) -1.311,-102.646 ATMEGA2560.80@-1.311,-107.695 ATMEGA2560.80@-1.295,-107.711 ; R1.1@5.751,-33.777 5.867,-33.894 v1(5.867,-35.149) ; ATMEGA2560.31@6.182,-92.455 6.172,-92.446 6.172,-91.384 7.087,-90.47 9.677,-90.47 10.656,-89.491 C4.1@10.656,-88.898 10.857,-89.098 11.963,-89.098 v1(12.116,-89.251) ; ATMEGA2560.100@8.671,-107.695 8.671,-102.144 9.241,-101.574 ATMEGA2560.10@10.297,-101.574 13.165,-101.574 C3.1@13.864,-102.272 14.639,-102.272 15.316,-101.595 15.316,-100.376 16.535,-99.157 20.498,-99.157 21.26,-98.395 21.26,-93.975 19.917,-92.633 ICSP.2@19.917,-92.622
  Top Layer w0.305: R26.2@-30.991,-82.192 -30.991,-82.873 -30.099,-83.764 -24.308,-83.764 -21.412,-86.66 v1(-21.412,-87.117) ; R16.2@-28.421,-61.164 v1(-28.421,-59.687) ; R28.2@-14.734,-35.875 -14.734,-34.566 v1(-14.554,-34.387) ; C24.1@-8.458,-35.975 -8.394,-35.911 v1(-6.934,-35.911) ; R43.1@-4.343,-23.602 -4.343,-24.328 v1(-5.715,-25.7) -5.334,-26.081 IC3.8@-3.725,-26.081 ; v3(17.45,-25.548) 17.45,-23.102 PWR5.A@17.587,-22.964 ; R33.2@20.755,-134.134 22.1,-134.134 22.479,-134.514 ; v3(22.479,-134.971) 22.479,-134.514 ; R34.2@23.628,-134.056 22.936,-134.056 22.479,-134.514 ; R17.2@27.478,-81.341 27.478,-79.984 v1(27.661,-79.802) ; v1(31.013,-93.975) v1@31.048,-94.01
  Top Layer w0.356: E0.14@-40.513,-111.227 -38.176,-111.227 -34.442,-107.493 -34.442,-105.227 -33.205,-103.99 -28.531,-103.99 v3(-28.118,-103.424) ; -33.205,-101.99 -28.485,-101.99 v3(-28.118,-102.357) ; R37.2@-4.195,-84.732 -3.486,-84.984 v3(-2.362,-84.984) ; v3(29.032,-15.032) 29.169,-15.169 32.507,-15.169 32.918,-14.757 32.918,5.283 34.442,6.807 Y0.12@40.615,6.807 ; v3(29.032,-13.203) 29.066,-13.169 31.484,-13.169 32.029,-12.624 32.029,10.262 33.655,11.887 Y0.14@40.615,11.887
  Top Layer w0.406: Z.12@-40.742,-146.634 -40.513,-146.634 -37.516,-146.634 -33.458,-150.692 -32.063,-150.692 v1(-31.166,-151.741) -31.964,-152.692 -38.723,-152.692 -39.954,-151.46 -40.513,-151.46 Z.14@-40.691,-151.46 ; SD.6@-3.556,-151.994 -3.302,-151.74 -3.302,-138.278 -2.012,-136.988 C10.1@-2.012,-121.649 -2.003,-121.641 IC1.8@-2.003,-119.603 ; D10.C@-2.596,-86.812 -2.362,-86.579 v3(-2.362,-84.984) ; IC2.4@16.967,-121.175 18.292,-121.175 18.974,-120.493 18.974,-118.664 20.041,-117.597 21.412,-117.597 22.022,-116.988 22.022,-116.009 C18.1@22.479,-115.856 ; IC2.19@24.218,-125.075 25.212,-125.075 v1(25.527,-124.76) 25.192,-124.425 IC2.20@24.218,-124.425 ; v2(28.575,-40.788) 28.798,-41.01 33.844,-41.01 36.271,-38.583 36.271,-34.214 37.033,-33.452 40.615,-33.452 X1.12@40.742,-33.452 ; v2(28.575,-39.111) 28.676,-39.01 33.405,-39.01 34.823,-37.592 34.823,-29.82 36.449,-28.194 X1.14@40.615,-28.194 ; R29.2@30.614,-61.224 30.614,-58.103 31.623,-57.094 v2(31.623,-53.132)
  Top Layer w0.61: E0.12@-40.513,-106.147 -37.668,-106.147 -33.511,-101.99 -32.334,-101.99 ; D4.C@-29.84,-33.805 K1.1@-29.84,-30.664 ; U1.5@-9.454,-33.813 -8.458,-34.808 C24.1@-8.458,-35.975
  Top Layer w0.813: D4.C@-29.953,-33.918 D4.C@-29.84,-33.805 ; LM2595.4@-7.998,-51.083 -6.849,-51.083 -5.715,-52.218 -5.715,-55.113 -4.343,-56.485 -2.21,-56.485 2.255,-60.95 C7.1@2.255,-62.726 ; R34.2@23.628,-134.056 R34.2@24.01,-134.134
  Top Layer w1: HOTEND0.1@-40.31,-25.578 -39.345,-25.578 -35.992,-28.931 -31.574,-28.931 K1.1@-29.84,-30.664
  Top Layer w1.016: C21.1@18.144,-115.856 C17.1@20.345,-115.856 C18.1@22.479,-115.856 23.926,-117.151 D8.C@25.274,-117.151 ; v1(24.613,-118.359) 24.613,-117.812 D8.C@25.274,-117.151 ; v1(25.375,-118.359) 25.274,-118.258 D8.C@25.274,-117.151 ; v1(26.137,-118.359) 26.137,-118.014 25.928,-117.806 D8.C@25.274,-117.151
  Bottom Layer w0.254: -2.057,-90.622 1.143,-90.622 1.6,-90.165 2.362,-90.165 3.581,-91.384 8.763,-91.384 11.049,-89.098 11.963,-89.098 v1(12.116,-89.251) 13.03,-90.165 18.974,-90.165 19.917,-91.109 ICSP.2@19.917,-92.622 ; 5.715,-37.587 5.715,-35.301 v1(5.867,-35.149)
  Bottom Layer w0.305: v1(-28.421,-59.687) -28.421,-51.762 ; v1(-21.412,-87.117) -21.26,-87.27 -21.107,-87.27 ; v1(-14.554,-34.387) -14.554,-35.149 -13.792,-35.911 v1(-6.934,-35.911) -2.515,-35.911 ; v1(-6.325,-98.242) -5.563,-98.242 -2.057,-94.585 ; v1(-5.715,-25.7) -4.953,-25.7 -2.515,-28.138 -2.515,-29.205 ; v1(-1.6,-102.357) -1.6,-94.432 ; 17.45,-33.638 v3(17.45,-25.548) ; v3(22.479,-134.971) 22.479,-135.865 23.038,-136.423 24.79,-136.423 ; v1(27.661,-79.802) 27.661,-83.002 30.556,-85.898 ; v1(31.013,-93.975) 31.013,-93.67 ; v1@31.013,-92.299 v1(31.013,-92.146)
  Bottom Layer w0.356: v3(-28.118,-103.424) -19.964,-103.424 ; v3(-28.118,-102.357) -19.634,-102.357 ; v3(-2.362,-84.984) -2.362,-84.222 ; v3(29.032,-15.032) 29.032,-14.575 ; 29.032,-13.66 v3(29.032,-13.203)
  Bottom Layer w0.406: v1(-31.166,-151.741) -29.185,-149.912 -19.736,-149.912 ; -29.032,-51.303 -28.88,-51.303 -28.727,-51.456 ; -29.032,-49.932 -29.032,-50.084 -28.727,-50.389 ; 25.375,-125.065 25.527,-124.912 v1(25.527,-124.76) ; v2(28.575,-40.788) 33.604,-40.788 35.281,-42.464 35.281,-49.474 v2(31.623,-53.132) ; 30.861,-85.441 30.861,-83.764 v2(32.385,-82.24)
  Bottom Layer w0.61: UART1.1@-9.45,-85.8 -2.308,-85.8 -2.21,-85.898 ; 23.851,-38.044 24.917,-39.111 v2(28.575,-39.111) v2(28.575,-40.788)
  Bottom Layer w0.813: K1.1@-29.84,-30.664 -29.032,-31.472 -29.032,-49.932 ; I2C.1@-12.379,-85.814 -12.365,-85.8 UART1.1@-9.45,-85.8 ; SD.6@-3.539,-152.585 -1.565,-154.559 ; -1.057,-160.96 -1.057,-154.559 ; LCD.1@14.725,-152.5 16.215,-153.99 ; 14.945,-159.056 LCD.1@14.945,-153.99 ; +24V.3@15.885,-32.582 16.254,-32.582 17.45,-33.777 ; 17.45,-37.435 17.45,-33.777 ; 17.45,-33.638 17.45,-33.777
  Bottom Layer w1: X0.14@-40.488,-18.364 -38.303,-18.364 -38.049,-18.618 ; X0.12@-40.488,-13.284 -38.786,-13.284 -38.049,-14.021 -38.049,-18.618 ; HOTEND0.1@-40.208,-25.425 -38.049,-23.266 -38.049,-18.618
  Bottom Layer w1.27: +24V.1@13.345,-32.582 +24V.3@15.885,-32.582
  other v2: -2.667,-70.353 -1.6,-70.353 -0.533,-70.353 0.533,-70.353 1.6,-70.353 2.667,-70.353 3.734,-70.353 -2.667,-69.286 -1.6,-69.286 -0.533,-69.286 0.533,-69.286 1.6,-69.286 2.667,-69.286 3.734,-69.286 1.6,-68.22 2.667,-68.22 3.734,-68.22 2.667,-67.153 3.734,-67.153 2.667,-66.086 3.734,-66.086
  other v7: 0.076,-67
+24V: D3.C D5.C D6.C D7.C D9.C E0.1 E0.3 E0.5 E1.1 E1.3 E1.5 F1.2 HEATEDBED.1 HOTEND0.8 HOTEND0.10 HOTEND0.12 HOTEND0.18 HOTEND0.19 HOTEND1.8 HOTEND1.10 HOTEND1.12 HOTEND1.18 HOTEND1.19 LED1.A LED2.A LED3.A X0.1 X0.3 X0.5 X1.1 X1.3 X1.5 Y0.1 Y0.3 Y0.5 Z.1 Z.3 Z.5 | length 79.3
  Top Layer w0.406: LED3.A@26.385,-75.059 LED3.A@26.403,-75.078 ; D9.C@29.288,-72.89 D9.C@29.288,-72.84
  Top Layer w0.61: LED3.A@26.403,-75.078 27.356,-75.078 29.264,-72.869 D9.C@29.288,-72.84
  Top Layer w0.813: X0.5@-40.488,4.496 -35.458,4.496 -33.272,2.309 F1.2@-33.272,-10.974 ; D5.C@-29.907,-71.896 D7.C@-29.907,-70.333 -27.957,-68.384 LED2.A@-27.222,-68.384
  Top Layer w1.016: D3.C@5.013,-18.312 D3.C@5.138,-18.187
  Top Layer w1.27: D3.C@5.013,-18.312 6.053,-17.273 LED1.A@7.531,-17.273 7.531,-1.664 20.955,11.76 HEATEDBED.1@20.955,19.558 ; E1.1@40.615,-154.28 43.942,-154.28
  other v1: 30.124,-71.679 30.759,-71.679 -31.42,-71.501 -30.861,-71.476 30.759,-71.247 30.15,-71.222 -31.471,-70.891 -30.912,-70.891 30.759,-70.79 30.124,-70.764 -31.445,-70.383 -30.937,-70.358 30.124,-70.358 30.734,-70.333
ADC10: ADC.1 ATMEGA2560.87 | length 31.4
  Top Layer w0.254: ATMEGA2560.87@2.169,-107.695 2.169,-106.818 3.124,-105.862 v1(5.258,-105.862) ; v1(16.688,-104.338) 22.174,-104.338 25.984,-100.528 25.984,-98.7 27.508,-97.176 ADC.1@27.508,-97.023
  Bottom Layer w0.254: v1(5.258,-105.862) 6.172,-105.862 7.696,-104.338 v1(16.688,-104.338)
ADC11: ADC.2 ATMEGA2560.86 | length 35.1
  Top Layer w0.254: ATMEGA2560.86@1.686,-107.695 1.686,-106.538 3.429,-104.796 v1(5.258,-104.796) ; v1(17.602,-103.576) 17.755,-103.729 21.869,-103.729 25.375,-100.224 25.375,-95.042 25.832,-94.585 27.407,-94.585 ADC.2@27.508,-94.483
  Bottom Layer w0.254: v1(5.258,-104.796) 6.172,-104.796 7.087,-103.881 15.621,-103.881 15.926,-103.576 v1(17.602,-103.576)
ADC12: ADC.3 ATMEGA2560.85 | length 38.5
  Top Layer w0.254: ATMEGA2560.85@1.178,-107.695 1.178,-105.979 3.277,-103.881 v1(5.258,-103.881) ; v1(17.907,-102.814) 18.212,-103.119 21.717,-103.119 24.917,-99.919 24.917,-92.451 25.425,-91.943 ADC.3@27.508,-91.943
  Bottom Layer w0.254: v1(5.258,-103.881) 5.715,-103.424 15.164,-103.424 15.773,-102.814 v1(17.907,-102.814)
ADC13: ADC.4 ATMEGA2560.84 | length 41.8
  Top Layer w0.254: ATMEGA2560.84@0.67,-107.695 0.67,-105.573 3.429,-102.814 v1(5.258,-102.814) ; v1(18.059,-101.9) 18.669,-102.51 21.565,-102.51 24.46,-99.614 24.46,-90.165 25.222,-89.403 ADC.4@27.508,-89.403
  Bottom Layer w0.254: v1(5.258,-102.814) 5.41,-102.967 14.707,-102.967 15.773,-101.9 v1(18.059,-101.9)
B-PWM: ATMEGA2560.26 R22.2 | length 80.9
  Top Layer w0.254: v1(-2.667,-100.681) 0.381,-100.681 7.468,-93.62 8.357,-93.62 8.671,-93.305 ATMEGA2560.26@8.671,-92.455
  Top Layer w0.305: R22.2@-29.677,-148.693 -29.677,-147.814 -26.721,-144.858 -26.721,-123.038 -26.005,-122.322 -25.984,-122.322 -24.46,-120.798 -13.487,-120.798 -6.325,-113.635 v1(-6.325,-113.33)
  Bottom Layer w0.254: v1(-6.325,-113.33) -6.325,-107.844 -3.734,-105.253 -3.734,-101.748 v1(-2.667,-100.681)
BED_THERM: ATMEGA2560.82 R45.2 | length 91.2
  Top Layer w0.254: -14.734,-39.909 -17.145,-42.32 -17.145,-64.867 -16.535,-65.476 -16.535,-69.439 -14.097,-71.877 -14.097,-94.28 -13.183,-95.194 -11.506,-95.194 v1(-9.22,-97.48) ; v1(-7.239,-111.044) -6.934,-110.739 -3.581,-110.739 -2.362,-109.52 -1.143,-109.52 -0.32,-108.697 ATMEGA2560.82@-0.32,-107.695
  Top Layer w0.305: -14.734,-39.909 -14.698,-39.873 -12.639,-39.873 R45.2@-10.541,-37.775
  Bottom Layer w0.254: v1(-9.22,-97.48) -9.22,-100.833 -8.23,-101.824 -8.23,-110.053 v1(-7.239,-111.044)
BED_THERM_CON: C15.1 HEATEDBED.3 R28.1 R45.1 TP13.TP | length 86.9
  Top Layer w0.305: R28.1@-14.734,-37.775 -14.734,-38.17 v1(-13.64,-39.264)
  Top Layer w0.406: R28.1@-14.734,-37.775 C15.1@-12.633,-37.775 -12.49,-37.775 -10.591,-35.875 R45.1@-10.541,-35.875 -10.592,-35.824 -10.592,-34.539 -12.725,-32.406 -12.725,-21.89 -7.696,-16.861 -7.696,-5.461 -1.676,0.559 -1.676,21.641 -1.245,22.073 9.042,22.073 11.176,19.939 11.176,19.558 HEATEDBED.3@11.176,19.38
  Bottom Layer w0.305: TP13.TP@-15.926,-38.654 -14.249,-38.654 v1(-13.64,-39.264)
E0-!EN: ATMEGA2560.72 L7.1 TP34.TP | length 25.9
  Top Layer w0.254: L7.1@-23.87,-97.785 -22.479,-97.785 ; v1(-22.631,-96.871) -22.631,-97.633 -22.479,-97.785 ; ATMEGA2560.72@-4.943,-104.571 -14.931,-104.571 -21.717,-97.785 -22.479,-97.785
  Bottom Layer w0.254: TP34.TP@-25.781,-96.668 -22.835,-96.668 v1(-22.631,-96.871)
E0-DIR: ATMEGA2560.73 L8.1 TP33.TP | length 25.6
  Top Layer w0.254: L8.1@-23.87,-99.614 -22.479,-99.614 ; v1(-22.784,-100.528) -22.784,-99.919 -22.479,-99.614 ; ATMEGA2560.73@-4.943,-105.079 -16.709,-105.079 -22.174,-99.614 -22.479,-99.614
  Bottom Layer w0.254: TP33.TP@-25.781,-99.716 -23.597,-99.716 v1(-22.784,-100.528)
E0-STEP: ATMEGA2560.71 L6.1 TP35.TP | length 26
  Top Layer w0.254: v1(-23.851,-94.585) -23.851,-95.937 L6.1@-23.87,-95.956 -21.565,-95.956 -13.458,-104.063 ATMEGA2560.71@-4.943,-104.063
  Bottom Layer w0.254: TP35.TP@-25.781,-93.772 -24.816,-93.62 v1(-23.851,-94.585)
E0-STOP: ATMEGA2560.74 E0.11 | length 38.6
  Top Layer w0.254: E0.11@-40.513,-103.607 -36.652,-103.607 -34.035,-100.99 -24.913,-100.99 -20.316,-105.587 ATMEGA2560.74@-4.943,-105.587
E1-!EN: ATMEGA2560.95 L10.2 TP31.TP | length 26.8
  Top Layer w0.254: ATMEGA2560.95@6.182,-107.695 6.172,-107.706 6.172,-108.758 7.087,-109.672 11.201,-109.672 14.554,-106.32 24.003,-106.32 24.308,-106.015 L10.2@25.089,-106.015 v1(26.289,-106.015)
  Bottom Layer w0.254: TP31.TP@22.682,-105.71 25.984,-105.71 v1(26.289,-106.015)
E1-DIR: ATMEGA2560.96 L11.2 TP32.TP | length 27.2
  Top Layer w0.254: ATMEGA2560.96@6.665,-107.695 6.629,-107.731 6.629,-108.606 7.239,-109.215 11.049,-109.215 14.402,-105.862 22.479,-105.862 24.155,-104.186 L11.2@25.089,-104.186 v1(26.289,-104.186)
  Bottom Layer w0.254: TP32.TP@22.682,-102.662 24.765,-102.662 v1(26.289,-104.186)
E1-STEP: ATMEGA2560.94 L9.2 TP30.TP | length 28.1
  Top Layer w0.254: ATMEGA2560.94@5.674,-107.695 5.715,-107.736 5.715,-108.91 6.934,-110.13 11.354,-110.13 14.707,-106.777 22.936,-106.777 24.003,-107.844 L9.2@25.089,-107.844 v1(26.289,-107.844)
  Bottom Layer w0.254: TP30.TP@22.682,-108.758 25.375,-108.758 v1(26.289,-107.844)
E1-STOP: ATMEGA2560.97 E1.11 | length 57.3
  Top Layer w0.254: ATMEGA2560.97@7.173,-107.695 7.173,-108.539 7.391,-108.758 10.897,-108.758 14.554,-105.1 22.327,-105.1 24.572,-102.855 28.509,-102.855 32.893,-107.239 32.893,-119.151 37.109,-123.368 37.109,-128.092 37.897,-128.88 E1.11@40.615,-128.88
EARTH: L21.2 pad.MH1@41.54,-161.546 U$6.S1 U$6.S2 | length 32.5
  Top Layer w0.305: U$6.S2@21.672,-160.884 23.368,-159.187 23.368,-151.13 31.242,-143.256 31.242,-133.09 L21.2@30.74,-132.588
  other v1: 41.545,-163.827 39.868,-163.37 43.069,-163.218 39.106,-161.541 43.831,-161.541 39.716,-160.17 43.374,-160.17 41.545,-159.255
G-PWM: ATMEGA2560.24 R20.2 | length 79.7
  Top Layer w0.254: v1(-4.496,-108.606) -4.039,-108.148 -4.039,-107.082 -2.819,-105.862 -2.819,-102.51 -1.905,-101.595 0.991,-101.595 8.022,-94.564 ATMEGA2560.24@10.297,-94.564
  Top Layer w0.305: R20.2@-21.448,-148.693 -21.448,-148.272 -24.536,-145.183 -24.536,-123.292 -23.566,-122.322 -11.963,-122.322 v1(-4.648,-115.006)
  Bottom Layer w0.305: v1(-4.648,-115.006) -4.648,-108.758 v1(-4.496,-108.606)
GND: +5V.2 +5V.4 +24V.2 +24V.4 ATMEGA2560.11 ATMEGA2560.32 ATMEGA2560.62 ATMEGA2560.81 ATMEGA2560.99 C1.2 C2.2 C3.2 C4.2 C5.2 C6.2 C7.2 C8.- C9.2 C10.2 C11.2 C12.- C13.- C14.2 C15.2 C16.2 C17.2 C18.2 C20.2 C21.2 C22.2 C23.2 C24.2 C25.2 D1.A E0.2 E0.4 E0.8 E0.10 E0.13 E0.15 E1.2 E1.4 E1.8 E1.10 E1.13 E1.15 HEATEDBED.2 HOTEND0.2 HOTEND0.4 HOTEND0.7 HOTEND0.9 HOTEND0.11 HOTEND0.17 HOTEND1.2 HOTEND1.4 HOTEND1.7 HOTEND1.9 HOTEND1.11 HOTEND1.17 I2C.2 IC1.4 IC2.7 IC2.18 IC2.21 IC2.25 IC2.26 IC3.1 IC3.4 ICSP.6 L21.1 LCD.4 LCD.6 LM2595.3 LM2595.5 LM2595.6 Q1.1 Q1.2 Q1.3 Q2.1 Q2.2 Q2.3 Q3.1 Q3.2 Q3.3 Q4.2 Q5.2 Q6.2 Q7.2 Q8.2 Q9.2 R7.2 R10.2 R13.2 R18.2 R23.2 R24.2 R25.2 R31.2 R38.1 R39.1 R40.2 R41.1 R42.2 RESET.A RESET.A' SD.1 SH1.1 SH1.2 STAT.C SUPPLY.2 SUPPLY.4 TP1.TP U1.2 U$6.GND UART1.2 X0.2 X0.4 X0.8 X0.10 X0.13 X0.15 X1.2 X1.4 X1.8 X1.10 X1.13 X1.15 Y0.2 Y0.4 Y0.8 Y0.10 Y0.13 Y0.15 Z.2 Z.4 Z.8 Z.10 Z.13 Z.15 | length 95.1
  Top Layer w0.254: C15.2@-12.633,-35.875 -12.633,-34.599 v1(-12.421,-34.387) ; C5.2@-7.829,-100.176 -7.22,-99.567 -6.617,-99.567 ATMEGA2560.62@-4.943,-99.567 ; ATMEGA2560.81@-0.828,-107.695 -0.828,-106.31 -0.533,-106.015 ; ATMEGA2560.32@5.674,-92.455 5.674,-91.273 6.934,-90.013 7.642,-90.013 C4.2@8.756,-88.898 cw(c8.641,-88.783) C4.2@8.641,-88.946 ; v1@6.629,-88.489 v1@6.715,-88.574 ; 7.391,-105.405 8.189,-106.202 ATMEGA2560.99@8.189,-107.695 ; 8.306,-101.29 8.53,-101.066 ATMEGA2560.11@10.297,-101.066 13.17,-101.066 C3.2@13.864,-100.372 ; 33.132,-40.01 33.195,-40.01
  Top Layer w0.305: v1(-10.592,-29.967) -10.516,-29.891 IC3.4@-8.925,-29.891 ; v8(-10.592,-26.157) -10.516,-26.081 IC3.1@-8.925,-26.081 ; C24.2@-8.458,-37.675 -8.458,-38.044 -7.696,-38.806 v1(-7.696,-39.264) ; U1.2@-6.853,-32.863 v1(-5.715,-32.863) ; R41.1@-2.479,-33.777 -2.479,-34.27 -2.327,-34.27 v1(-0.991,-35.606) -0.264,-34.88 R42.2@-0.264,-33.777 ; R7.2@5.682,-30.301 5.682,-31.611 v1(5.715,-31.644) ; v1@6.715,-88.574 6.934,-88.794 SH1.2@6.934,-89.124 ; 6.934,-90.013 SH1.1@6.934,-89.632 ; 14.895,-123.124 IC2.7@16.967,-123.124 18.629,-123.124 ; IC2.18@24.218,-125.725 22.905,-125.725 22.606,-125.425 22.606,-124.333 23.164,-123.775 IC2.21@24.218,-123.775 26.288,-123.775
  Top Layer w0.61: v1(-9.068,-20.366) -8.741,-20.693 -8.741,-20.953 ; Q9.2@-8.741,-21.52 -8.741,-20.953 ; v1(-8.153,-20.366) -8.741,-20.953
  Top Layer w1.016: v1(-9.068,-20.366) -8.611,-19.909 ; v1(-8.611,-19.452) -8.611,-19.909 ; v1(-8.153,-20.366) -8.611,-19.909 ; C2.2@3.865,-80.059 3.865,-78.147 4.191,-77.821 ; 6.477,-77.821 6.809,-78.152 C1.2@6.809,-80.059
  Top Layer w1.27: v1(3.277,-88.336) v1(3.277,-86.66) 3.277,-86.05 -0.076,-86.05 -0.229,-86.05 -0.229,-85.898 v1(-0.229,-77.821) 4.191,-77.821 6.477,-77.821 v1(10.592,-77.821) 10.592,-85.898 10.592,-86.05 10.439,-86.05 6.629,-86.05 v1(6.629,-86.66) v1(6.629,-88.336) v1@6.629,-88.489
  Bottom Layer w0.254: v1(-12.421,-34.387) v1@-12.268,-34.234 ; 7.391,-105.405 7.696,-105.71
  Bottom Layer w0.305: v1@-10.592,-30.12 v1(-10.592,-29.967) ; -10.592,-26.462 v8(-10.592,-26.157) ; v1(-7.696,-39.264) -7.391,-39.416 ; v1(-5.715,-32.863) -5.715,-32.558 ; v1(-0.991,-35.606) -0.838,-35.606 -0.686,-35.758 ; v1(5.715,-31.644) 6.02,-31.644
  other v1: -32.233,-161.952 -32.233,-158.752 -32.537,-154.942 -31.623,-154.942 -26.441,-152.351 -22.479,-152.351 -4.572,-137.973 7.163,-137.922 5.74,-137.897 -17.45,-137.866 -15.469,-137.866 -13.487,-137.866 -11.506,-137.866 -9.525,-137.866 -1.6,-137.866 0.381,-137.866 2.87,-137.871 4.343,-137.866 12.268,-137.866 14.249,-137.866 9.804,-137.744 -3.556,-136.906 -4.267,-136.881 -35.738,-126.589 -35.738,-124.912 29.337,-123.693 -35.738,-123.236 29.185,-122.779 19.888,-119.274 21.107,-119.274 22.327,-119.274 -30.099,-117.902 6.02,-116.226 8.001,-116.226 6.02,-114.244 8.001,-114.244 38.049,-112.141 36.068,-112.039 34.087,-112.014 -32.842,-111.196 34.061,-111.044 36.043,-111.044 38.024,-111.044 21.869,-110.892 23.851,-110.892 29.185,-109.977 -32.842,-109.672 25.07,-109.672 -22.53,-108.763 29.185,-108.453 -32.842,-108.148 -7.239,-107.539 -32.842,-106.777 -7.239,-106.472 -31.166,-102.967 -30.099,-102.967 5.88,-101.825 6.88,-101.825 7.88,-101.825 -6.617,-100.606 11.995,-100.301 -31.013,-99.919 -29.642,-99.919 -6.617,-99.844 15.347,-98.777 -30.709,-97.938 -29.337,-97.938 36.017,-97.353 36.017,-95.829 36.017,-94.305 -29.642,-92.756 36.017,-92.477 -27.661,-92.146 -29.032,-90.775 -26.289,-90.775 -27.661,-89.403 -24.917,-89.403 32.41,-88.621 -26.289,-88.032 10.995,-87.347 12.061,-87.347 32.41,-87.097 22.022,-86.812 12.061,-86.28 22.784,-86.203 21.26,-86.05 36.068,-85.979 -0.076,-85.898 10.439,-85.898 22.022,-85.593 32.41,-85.573 12.061,-85.213 21.26,-85.136 22.784,-85.136 36.068,-84.607 22.022,-84.374 32.41,-84.201 -9.982,-83.917 -8.763,-83.917 32.207,-81.229 31.318,-81.021 -8.306,-80.869 -7.087,-80.869 -5.867,-80.869 23.241,-79.802 29.947,-79.345 21.107,-79.04 22.327,-79.04 30.709,-78.735 -30.251,-78.43 -28.727,-78.43 -27.203,-78.43 -9.579,-78.355 -4.55,-78.355 31.471,-78.126 -11.713,-77.593 -4.55,-76.984 -9.579,-76.831 -19.176,-75.147 -18.11,-75.147 2.515,-75.078 7.849,-74.925 -19.176,-74.232 -18.11,-74.232 -8.055,-73.631 -6.836,-73.631 -19.176,-73.318 -18.11,-73.318 -19.176,-72.403 17.145,-71.877 18.364,-70.658 17.145,-70.506 18.364,-69.286 17.297,-68.982 18.364,-67.915 27.661,-64.714 28.88,-64.714 30.099,-64.714 31.471,-64.714 -30.404,-64.562 -29.185,-64.562 -27.965,-64.562 -22.022,-63.952 -22.936,-63.495 -22.022,-62.886 11.659,-61.057 27.356,-59.228 34.061,-58.618 32.995,-58.314 33.909,-57.399 -30.404,-57.201 29.489,-56.942 -29.312,-56.388 -30.785,-56.159 -30.531,-55.067 29.794,-53.894 -31.013,-53.437 -30.175,-53.365 -31.013,-52.37 -25.222,-49.779 -25.222,-48.865 30.556,-48.712 -25.222,-47.95 -31.039,-47.117 -3.886,-46.731 -3.886,-45.664 -31.09,-45.187 -30.251,-45.055 31.318,-45.055 -3.886,-44.598 -7.849,-43.836 -8.763,-43.378 31.318,-43.074 2.057,-42.921 -7.849,-42.769 2.057,-41.854 2.057,-40.788 31.471,-40.026 20.193,-39.873 -27.203,-39.416 -25.984,-39.416 -24.765,-39.416 -23.698,-39.416 -23.698,-38.044 32.995,-34.844 32.995,-33.472 32.995,-32.101 0.533,-31.034 1.448,-31.034 2.362,-31.034 3.277,-31.034 32.995,-30.729 0.533,-29.967 1.448,-29.967 2.362,-29.967 3.277,-29.967 32.995,-29.358 0.533,-29.053 1.448,-29.053 2.362,-29.053 10.439,-26.462 11.506,-25.7 10.439,-25.243 30.251,-19.147 31.318,-19.147 10.135,-18.69 11.354,-17.47 30.251,-17.166 31.166,-17.166 11.354,-15.946 11.354,-14.422 21.107,-14.118 31.013,-14.118 20.345,-13.66 21.869,-13.66 11.354,-12.898 30.556,-12.289 28.88,-11.527 29.947,-11.527 11.354,-11.374
  other v4: 7.874,-105.258
HOTEND0: D5.A HOTEND0.13 HOTEND0.14 HOTEND0.15 HOTEND0.16 Q2.5 Q2.6 Q2.7 Q2.8 R8.1 TP7.TP | length 9
  Top Layer w0.254: -30.099,-74.773 v3(-29.794,-75.078)
  Top Layer w0.61: Q2.5@-26.148,-71.157 -25.04,-70.048 -22.022,-70.048 -21.107,-69.134 -21.107,-68.421 R8.1@-21.07,-68.384
  Bottom Layer w0.254: v3(-29.794,-75.078) -28.515,-73.799 TP7.TP@-28.372,-73.799
HOTEND0_THERM: ATMEGA2560.88 R46.2 | length 81.7
  Top Layer w0.254: R46.2@-30.556,-61.174 v1(-30.556,-59.685) ; v1(-24.308,-77.973) -24.308,-82.088 -18.364,-88.032 -18.364,-96.109 -16.383,-98.09 -12.725,-98.09 -11.659,-99.157 v1(-11.659,-100.528) ; v1(-7.087,-111.958) -6.782,-111.654 1.6,-111.654 2.677,-110.577 ATMEGA2560.88@2.677,-107.695
  Bottom Layer w0.254: v1(-30.556,-59.685) -29.947,-60.295 -25.832,-60.295 -24.155,-61.971 -24.155,-77.821 v1(-24.308,-77.973) ; v1(-11.659,-100.528) -11.659,-101.595 -8.915,-104.338 -8.915,-110.739 -7.696,-111.958 v1(-7.087,-111.958)
HOTEND0_THERM_CON: C9.1 HOTEND0.3 R16.1 R46.1 TP12.TP | length 49.4
  Top Layer w0.305: R16.1@-28.421,-63.064 C9.1@-26.306,-61.182 -26.164,-61.182 v1(-24.917,-62.124)
  Top Layer w0.406: HOTEND0.3@-40.513,-30.505 -37.567,-30.505 -35.001,-33.071 -35.001,-41.046 -32.029,-44.018 -32.029,-62.586 -31.541,-63.074 R46.1@-30.556,-63.074 -28.43,-63.074 R16.1@-28.421,-63.064
  Bottom Layer w0.305: TP12.TP@-28.372,-62.673 -25.467,-62.673 v1(-24.917,-62.124)
HOTEND1: D6.A HOTEND1.13 HOTEND1.14 HOTEND1.15 HOTEND1.16 Q3.5 Q3.6 Q3.7 Q3.8 R11.1 TP8.TP | length 13.4
  Top Layer w0.305: v1(27.051,-67) 27.203,-67 27.356,-66.848
  Top Layer w0.406: Q3.5@25.222,-71.876 Q3.5@25.528,-71.876
  Top Layer w0.61: R11.1@20.259,-75.096 20.235,-73.249 24.155,-73.249 Q3.5@25.528,-71.876
  Bottom Layer w0.305: TP8.TP@25.679,-71.45 TP8.TP@25.679,-70.848 25.679,-68.372 v1(27.051,-67)
HOTEND1_THERM: ATMEGA2560.89 R47.2 | length 49.2
  Top Layer w0.254: ATMEGA2560.89@3.185,-107.695 3.185,-108.666 4.039,-109.52 5.715,-109.52 6.782,-110.587 11.506,-110.587 14.859,-107.234 20.041,-107.234 v1(20.345,-107.539) ; v1(20.498,-101.748) 21.565,-101.748 23.851,-99.462 23.851,-89.86 29.591,-84.12 R47.2@29.591,-83.241
  Bottom Layer w0.254: v1(20.345,-107.539) 20.345,-101.9 v1(20.498,-101.748)
HOTEND1_THERM_CON: C11.1 HOTEND1.3 R17.1 R47.1 TP11.TP | length 44.2
  Top Layer w0.305: v1(24.003,-83.155) 24.089,-83.241 C11.1@25.367,-83.241 ; R17.1@27.478,-83.241 27.574,-83.241 29.474,-81.341 R47.1@29.591,-81.341 30.363,-81.341 31.471,-82.448 31.471,-91.161 32.182,-91.872 32.182,-104.572 36.576,-108.966 HOTEND1.3@40.386,-108.966
  Top Layer w0.61: C11.1@25.367,-83.241 R17.1@27.478,-83.241
  Bottom Layer w0.305: v1(24.003,-83.155) 24.003,-82.489 TP11.TP@25.679,-80.812
INA_OUT: IC3.3 R41.2 U1.1 | length 10.6
  Top Layer w0.305: IC3.3@-8.925,-28.621 -7.061,-28.621 -6.172,-29.51 -6.172,-31.034 -4.379,-32.827 R41.2@-4.379,-33.777
  Top Layer w0.406: U1.1@-6.853,-33.813 -6.818,-33.777 R41.2@-4.379,-33.777
LCDRESET: ATMEGA2560.18 LCD.5 TP4.TP | length 65.2
  Top Layer w0.254: v1(8.306,-98.7) 9.419,-97.586 ATMEGA2560.18@10.297,-97.586
  Bottom Layer w0.254: 1.905,-106.32 1.905,-102.967 6.02,-98.852 8.153,-98.852 v1(8.306,-98.7)
  Bottom Layer w0.305: 1.905,-106.32 1.905,-148.84 LCD.5@4.565,-151.5 ; TP4.TP@3.819,-157.228 LCD.5@3.819,-153.025 ; LCD.5@4.565,-152.5 LCD.5@5.089,-153.025
LCDRX: ATMEGA2560.13 LCD.3 TP5.TP | length 82.5
  Top Layer w0.254: v1(8.458,-99.766) 8.767,-100.075 ATMEGA2560.13@10.297,-100.075
  Bottom Layer w0.254: 2.972,-106.015 2.972,-102.662 5.867,-99.766 v1(8.458,-99.766)
  Bottom Layer w0.305: 2.972,-106.015 2.972,-119.883 8.375,-125.286 8.375,-145.288 ; TP5.TP@8.087,-157.228 8.375,-155.873 ; TP5.TP@8.382,-157.48 9.645,-156.217 LCD.3@9.645,-152.5 9.645,-146.551 8.407,-145.313 8.407,-130.906
LCDTX: ATMEGA2560.12 LCD.2 TP15.TP | length 65.6
  Top Layer w0.254: v1(7.696,-100.528) 7.751,-100.583 ATMEGA2560.12@10.297,-100.583
  Bottom Layer w0.254: 3.886,-105.71 3.886,-102.662 6.02,-100.528 v1(7.696,-100.528)
  Bottom Layer w0.305: 3.886,-105.71 3.886,-119.274 10.915,-126.302 10.915,-144.773 12.192,-146.05 12.192,-152.5 12.192,-157.228 TP15.TP@12.192,-157.48